# Altium PCB Balancing.PcbDoc
Units mm, origin at the board's own origin, x right, y up, seen from the top; angles counter-clockwise.
Board outline 100 x 70 mm, 2 copper layers (Top Layer, Bottom Layer); 8 components, 12 nets, 63 pads, 4 vias.
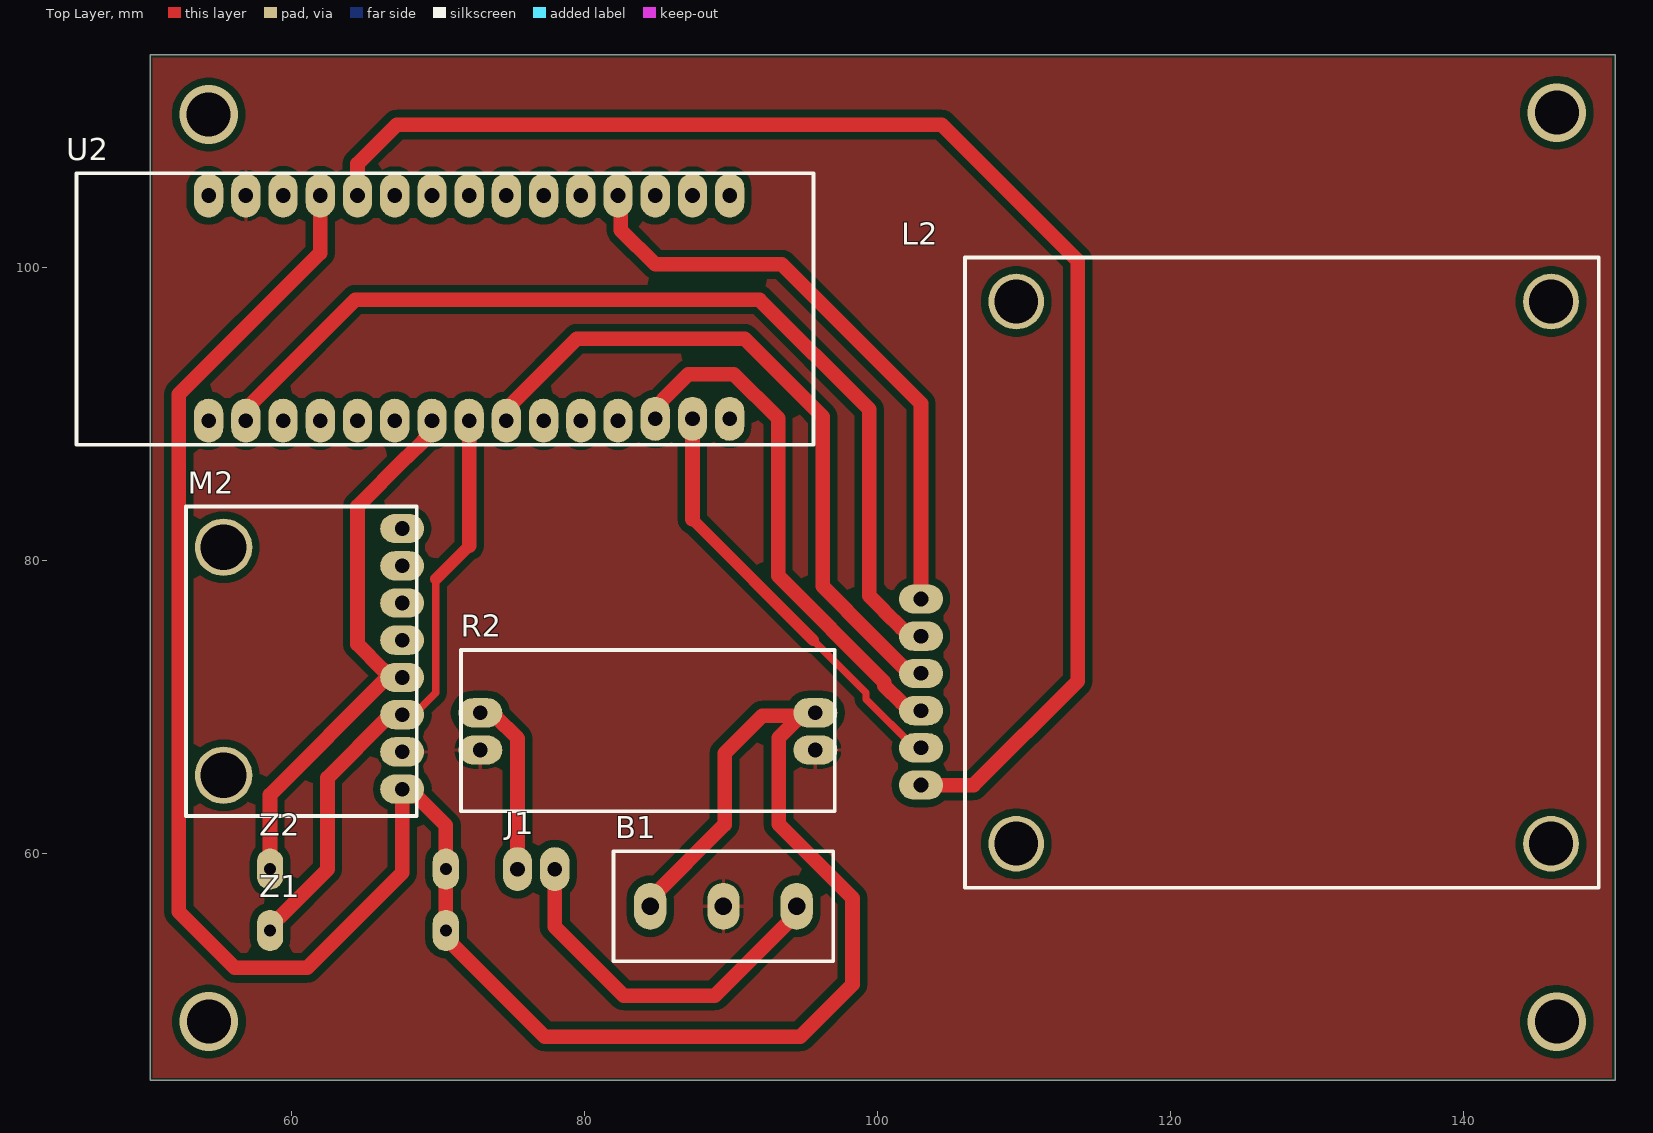
[diagram p0: Top Layer view]
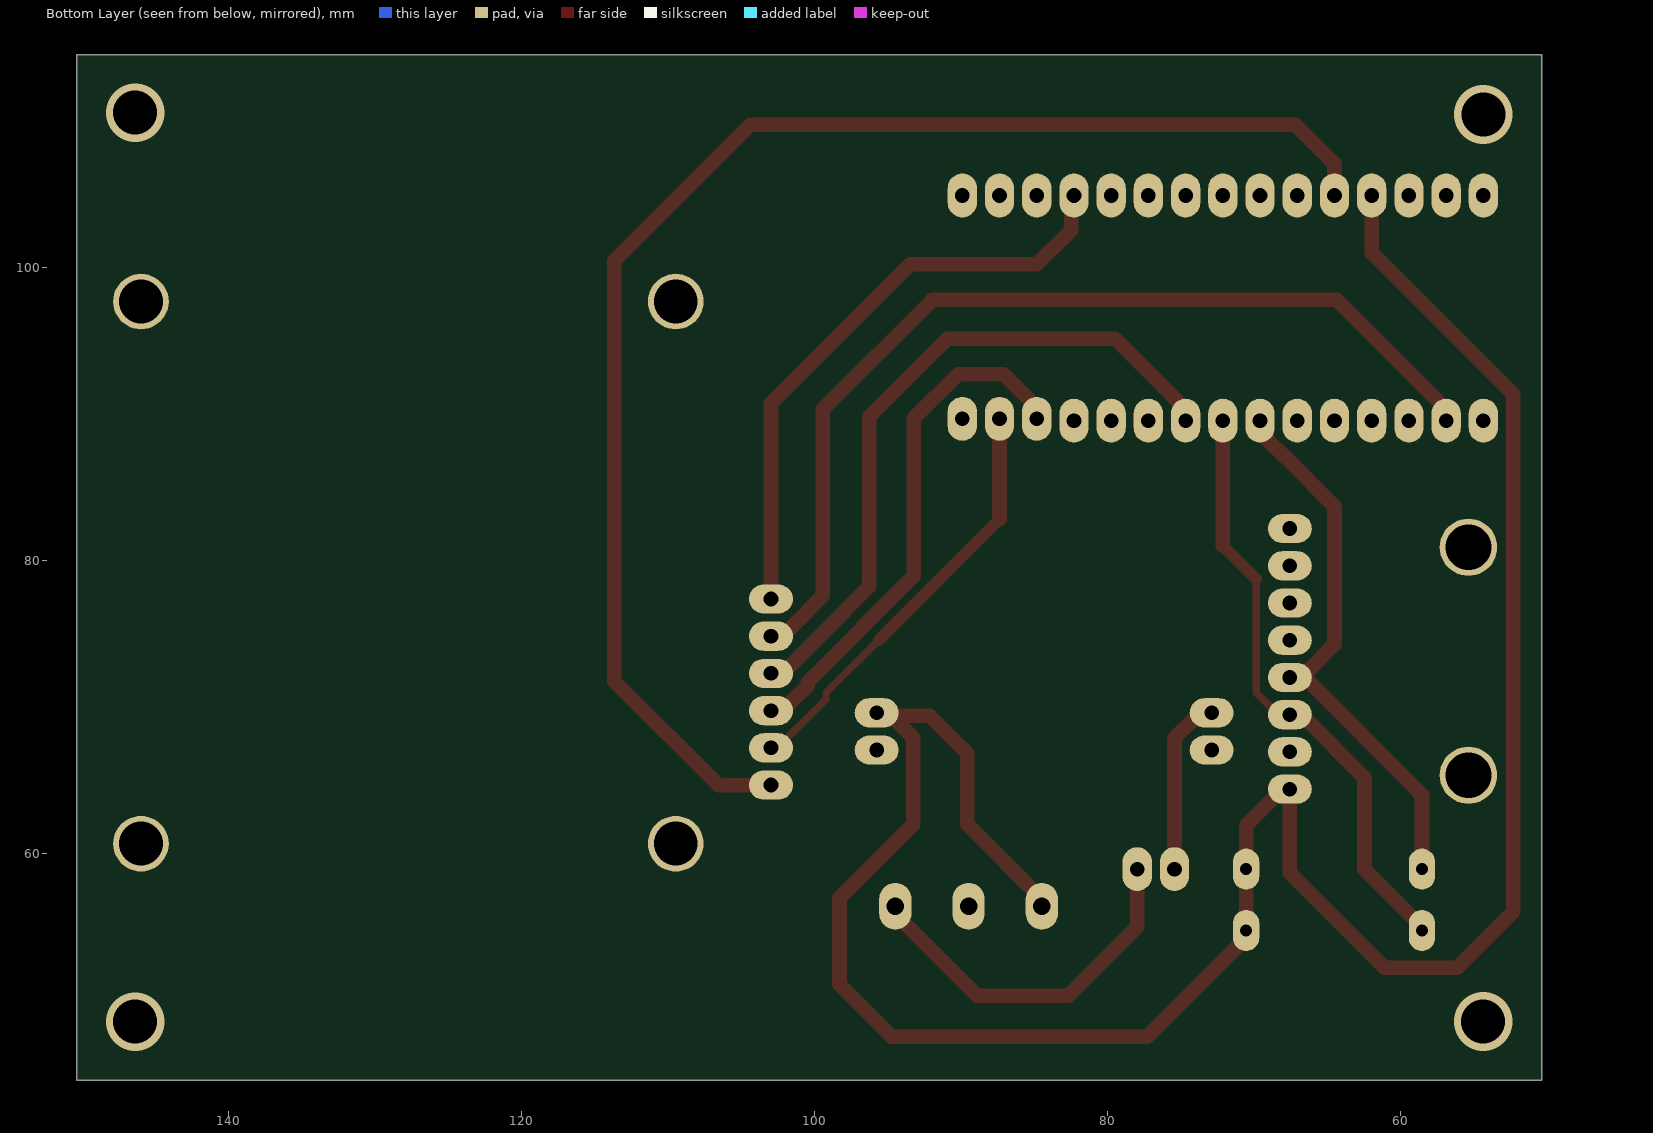
[diagram p1: Bottom Layer view, seen from below]

## Layer stack, top to bottom
Top Solder: solder mask 0.0102, Solder Resist, Dk 3.5
Top Layer: signal copper 0.0356
Dielectric 1: dielectric 0.32, FR-4, Dk 4.8
Bottom Layer: signal copper 0.0356
Bottom Solder: solder mask 0.0102, Solder Resist, Dk 3.5

## Board outline
50.368,44.521 50.368,114.521 150.368,114.521 150.368,44.521

## Design rules (kind name [scope] priority, off if disabled: settings)
Clearance [All] p1: gap=0.5 ignorepadtopadclearanceinfootprint=FALSE
PolygonConnect [All] p1: connectstyle=Relief reliefconductorwidth=0.254 reliefentries=4 polygonreliefangle="90 Angle" airgapwidth=0.254
RoutingVias [All] p1: holewidth=0.711 width=1.27 viastyle="Through Hole" minholewidth=0.711 minwidth=1.27 maxholewidth=0.711 maxwidth=1.27
SolderMaskExpansion [All] p1: expansion=0.102 istentingtop=FALSE
SupplyNets "Schematic Supply Nets_3" [InNet('GND')] p1: voltage=0.000
SupplyNets "Schematic Supply Nets_2" [InNet('+5V')] p2: voltage=0.000
SupplyNets "Schematic Supply Nets_1" [InNet('VCC')] p3: voltage=0.000
Width [All] p1: maxlimit=1.5 minlimit=0.5 preferedwidth=1
30 further rules are at their usual default settings.

## Components (designator, comment, footprint, x,y, rotation, side; value= is the part's Value field where it differs from the comment)
B1 "BLOCK" BLOCK 89.488,56.388 r180 top
J1 "JUMPER" JUMPER 75.438,58.928 r0 top
L2 "L298N" L298N 105.974,100.663 r270 top
M2 "MPU6050" MPU6050 67.564,64.389 r0 top
R2 "AMS1117" AMS1117 72.898,67.056 r0 top
U2 "L432KC" L432KC 89.916,89.662 r90 top
Z1 "RES" RES 70.547,54.737 r180 top
Z2 "RES" RES 70.547,58.928 r180 top

## Footprints (in the part's own frame and the unit in brackets; to place one, negate y for a bottom-side part, rotate by r counter-clockwise, add the part's x,y. Pads: shape width x height; smd on the part's side, far side on the other; paste and mask are expansions set on the pad)
AMS1117 [mm]
  oval 3x2 hole 1: 1(0,2.54) 2(0,0) 3(22.86,2.54) 4(22.86,0)
  silkscreen extent -1.32,-4.18 24.18,6.82, body extent -1.45,-4.33 24.05,6.87, height 3.2
BLOCK [mm]
  oval 2.2x3.2 hole 1.2: 1(-5,0) 2(0,0) 3(5,0)
  silkscreen extent -7.5,-3.75 7.5,3.75
JUMPER [mm]
  oval 2x3 hole 1: 1(0,0) 2(2.54,0)
L298N [mm]
  oval 2x3 hole 1: 1(23.3,-3) 2(25.84,-3) 3(28.38,-3) 4(30.92,-3) 5(33.46,-3) 6(36,-3)
  round 3.8 hole 3: ""(3,40) ""(3,3.5) ""(40,40) ""(40,3.5)
  silkscreen extent 0,0 43,43.25
L432KC [mm]
  oval 3x2 hole 1: 1(-0.127,35.56) 2(-0.127,33.02) 3(-0.127,30.48) 4(-0.127,27.94) 5(-0.127,25.4) 6(-0.127,22.86) 7(-0.127,20.32) 8(-0.127,17.78) 9(-0.127,15.24) 10(-0.127,12.7) 11(-0.127,10.16) 12(-0.127,7.62) 13(0,5.08) 14(0,2.54) 15(0,0) 16(15.24,35.56) 17(15.24,33.02) 18(15.24,30.48) 19(15.24,27.94) 20(15.24,25.4) 21(15.24,22.86) 22(15.24,20.32) 23(15.24,17.78) 24(15.24,15.24) 25(15.24,12.7) 26(15.24,10.16) 27(15.24,7.62) 28(15.24,5.08) 29(15.24,2.54) 30(15.24,0)
  silkscreen extent -1.78,-5.71 16.76,44.58, body extent -1.78,-6.48 16.77,45.53, height 8.5
MPU6050 [mm]
  oval 3x2 hole 1: 1(0,0) 2(0,2.54) 3(0,5.08) 4(0,7.62) 5(0,10.16) 6(0,12.7) 7(0,15.24) 8(0,17.78)
  round 3.92 hole 3.12: ""(-12.19,0.945) ""(-12.19,16.505)
  silkscreen extent -14.75,-1.83 1,19.28, body extent -14.6,-1.79 1.27,19.32, height 6.44
RES [mm]
  oval 1.8x2.8 hole 0.8: 1(0,0) 2(12,0)

## Via types
v1: diameter 4, hole 3, Top Layer to Bottom Layer, 4 vias

## Nets (pads, with @x,y where several pads share a name; then routed paths per layer and width w, separated by ;. In a path a pad name is that pad's centre, name@x,y a point inside that pad or via, vN(x,y) a via of type N, cw(c..) or ccw(c..) an arc to the next point about the centre after c; other vN are vias at no path point)
+5V: B1.3 M2.1 R2.3 U2.19 Z1.1 Z2.1 | length 162.4
  Top Layer w1: U2.19 61.976,100.979 52.324,91.327 52.324,56.007 56.134,52.197 61.087,52.197 67.564,58.674 M2.1 68.064,64.389 70.547,61.906 Z2.1 Z1.1 70.547,54.237 77.286,47.498 94.742,47.498 98.298,51.054 98.298,56.949 93.258,61.989 93.258,67.884 94.43,69.056 94.447,69.056 94.987,69.596 R2.3 ; B1.3 84.488,56.888 89.574,61.974 89.574,66.841 92.138,69.405 R2.3@94.43,69.405
+V: B1.1 J1.2 | length 25.2
  Top Layer w1: J1.2 77.978,54.991 82.677,50.292 88.892,50.292 94.488,55.888 B1.1
ENA: L2.1 U2.27 | length 41.2
  Top Layer w1: U2.27 82.487,104.711 82.487,102.54 84.825,100.203 93.472,100.203 102.974,90.701 L2.1
ENB: L2.6 U2.20 | length 99.3
  Top Layer w1: U2.20 64.516,107.061 67.183,109.728 104.394,109.728 113.665,100.457 113.665,71.755 106.553,64.643 L2.6@102.235,64.643
GND: B1.2 M2.2 R2.2 R2.4 U2.17
IN1: L2.2 U2.2 | length 66.2
  Top Layer w1: U2.2 57.087,89.726 57.087,90.515 64.363,97.79 91.948,97.79 99.441,90.297 99.441,77.597 100.474,76.564 100.474,76.535 101.646,75.363 101.663,75.363 102.223,74.803 L2.2@102.235,74.803
IN2: L2.3 U2.9 | length 46.6
  Top Layer w1: U2.9 74.867,89.726 74.867,90.515 79.476,95.123 90.932,95.123 96.266,89.789 96.266,78.232 97.941,76.557 97.941,76.528 101.646,72.823 101.663,72.823 102.223,72.263 L2.3@102.235,72.263
IN3: L2.4 U2.13 | length 35.1
  Top Layer w1: U2.13 84.836,90.433 85.376,90.973 85.376,90.99 87.096,92.71 90.196,92.71 93.218,89.688 93.218,78.939 100.474,71.683 100.474,71.455 101.646,70.283 101.663,70.283 102.223,69.723 L2.4@102.235,69.723
IN4: L2.5 U2.14 | length 29.2
  Top Layer w0.5: 95.628,74.549 99.224,70.953 99.224,70.518 102.539,67.203 L2.5
  Top Layer w0.8: 87.376,82.801 95.626,74.551
  Top Layer w1: 87.376,82.804 U2.14
SCL1: M2.3 U2.8 Z1.2 | length 41.4
  Top Layer w0.5: M2.3 68.335,69.469 68.352,69.469 69.85,70.967 69.85,78.722
  Top Layer w0.8: 69.85,78.722 72.136,81.008
  Top Layer w1: Z1.2 58.547,55.021 59.163,55.637 59.193,55.637 62.468,58.912 62.468,65.161 66.584,69.278 67.373,69.278 M2.3 ; 72.136,81.008 U2.8
SDA1: M2.4 U2.7 Z2.2 | length 37.8
  Top Layer w1: Z2.2 58.547,64.008 M2.4@66.548,72.009 ; M2.4@66.784,72.018 66.253,72.549 66.236,72.549 64.516,74.269 64.516,83.693 67.858,87.035 67.884,87.035 69.056,88.207 69.056,88.224 69.596,88.764 U2.7 ; M2.4@66.793,72.009 M2.4
VCC: J1.1 R2.1 | length 12.2
  Top Layer w1: R2.1 73.089,69.405 73.878,69.405 75.438,67.844 J1.1
pads on no net: L2. M2. M2.5 M2.6 M2.7 M2.8 U2.1 U2.3 U2.4 U2.5 U2.6 U2.10 U2.11 U2.12 U2.15 U2.16 U2.18 U2.21 U2.22 U2.23 U2.24 U2.25 U2.26 U2.28 U2.29 U2.30
copper on no net:
  other v1: 146.368,48.514 54.372,48.53 54.356,110.427 146.368,110.554

## Polygon pours and split planes (outlines as drawn)
GND on Top Layer "GND_L01_P000" (solid, pour order 0): 50.546,114.3 150.114,114.3 150.114,44.704 50.546,44.704

## Silkscreen, mask and mechanical layers (free items; w line width, h text height)
Mechanical 1:
  the board outline again, w0.254